# Altium PCB Board.PcbDoc
Units mm, origin at the board's own origin, x right, y up, seen from the top; angles counter-clockwise.
Board outline 173.2 x 200 mm, 2 copper layers (Top Layer, Bottom Layer); 151 components, 106 nets, 491 pads, 0 vias.
Unrouted connection lines stored in the file: 366.
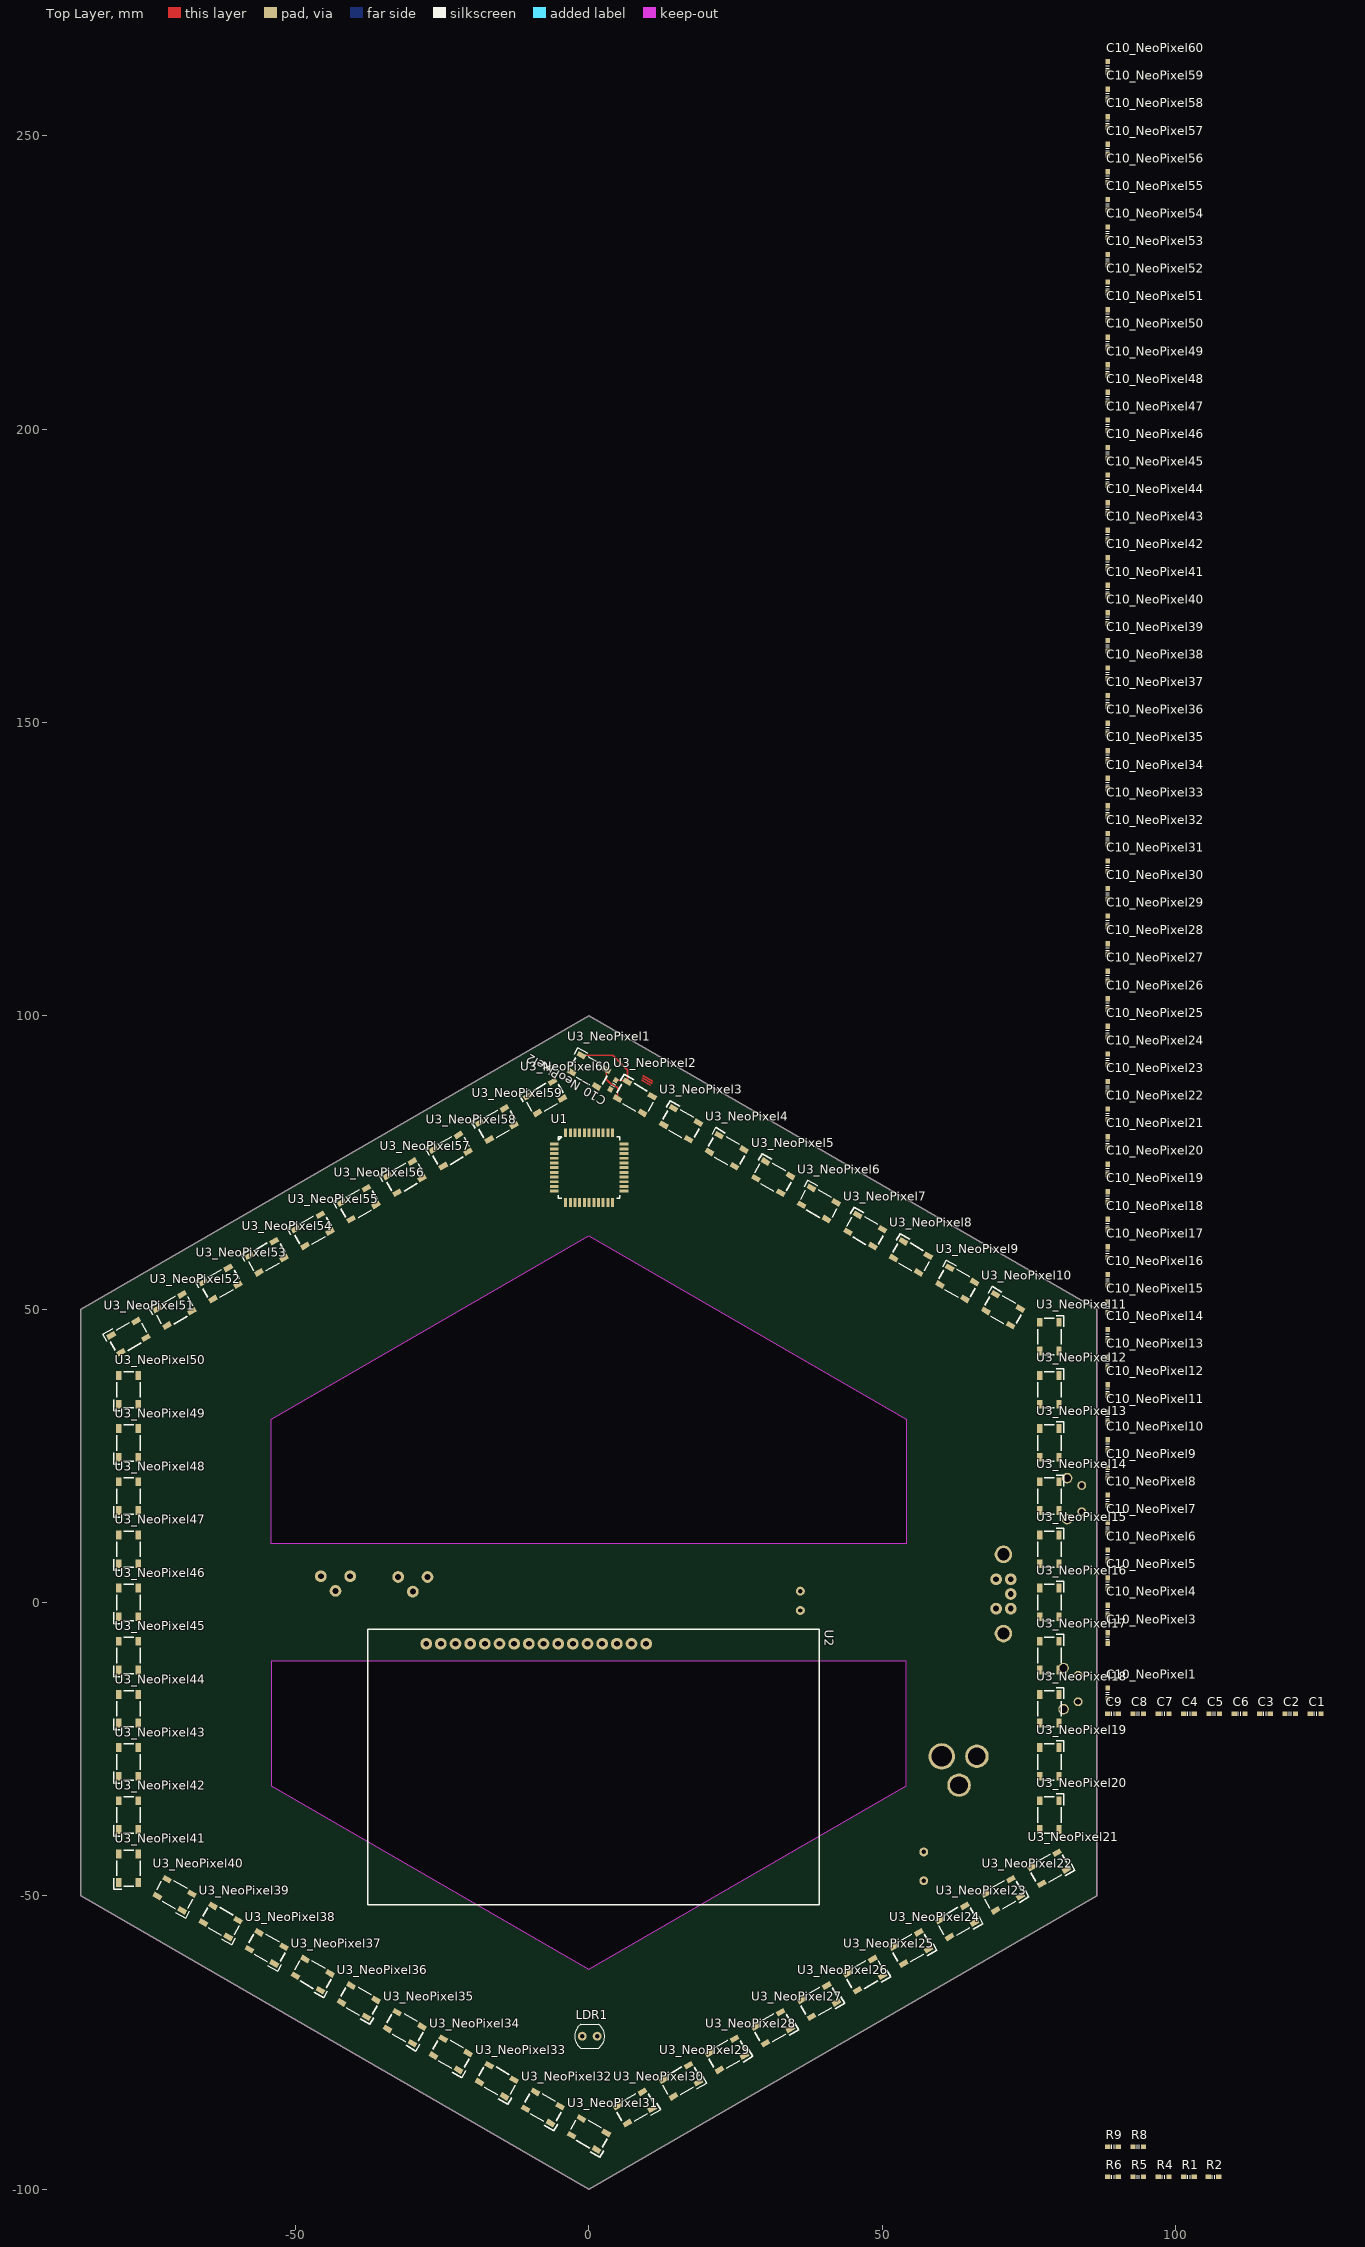
[diagram p0: Top Layer view]
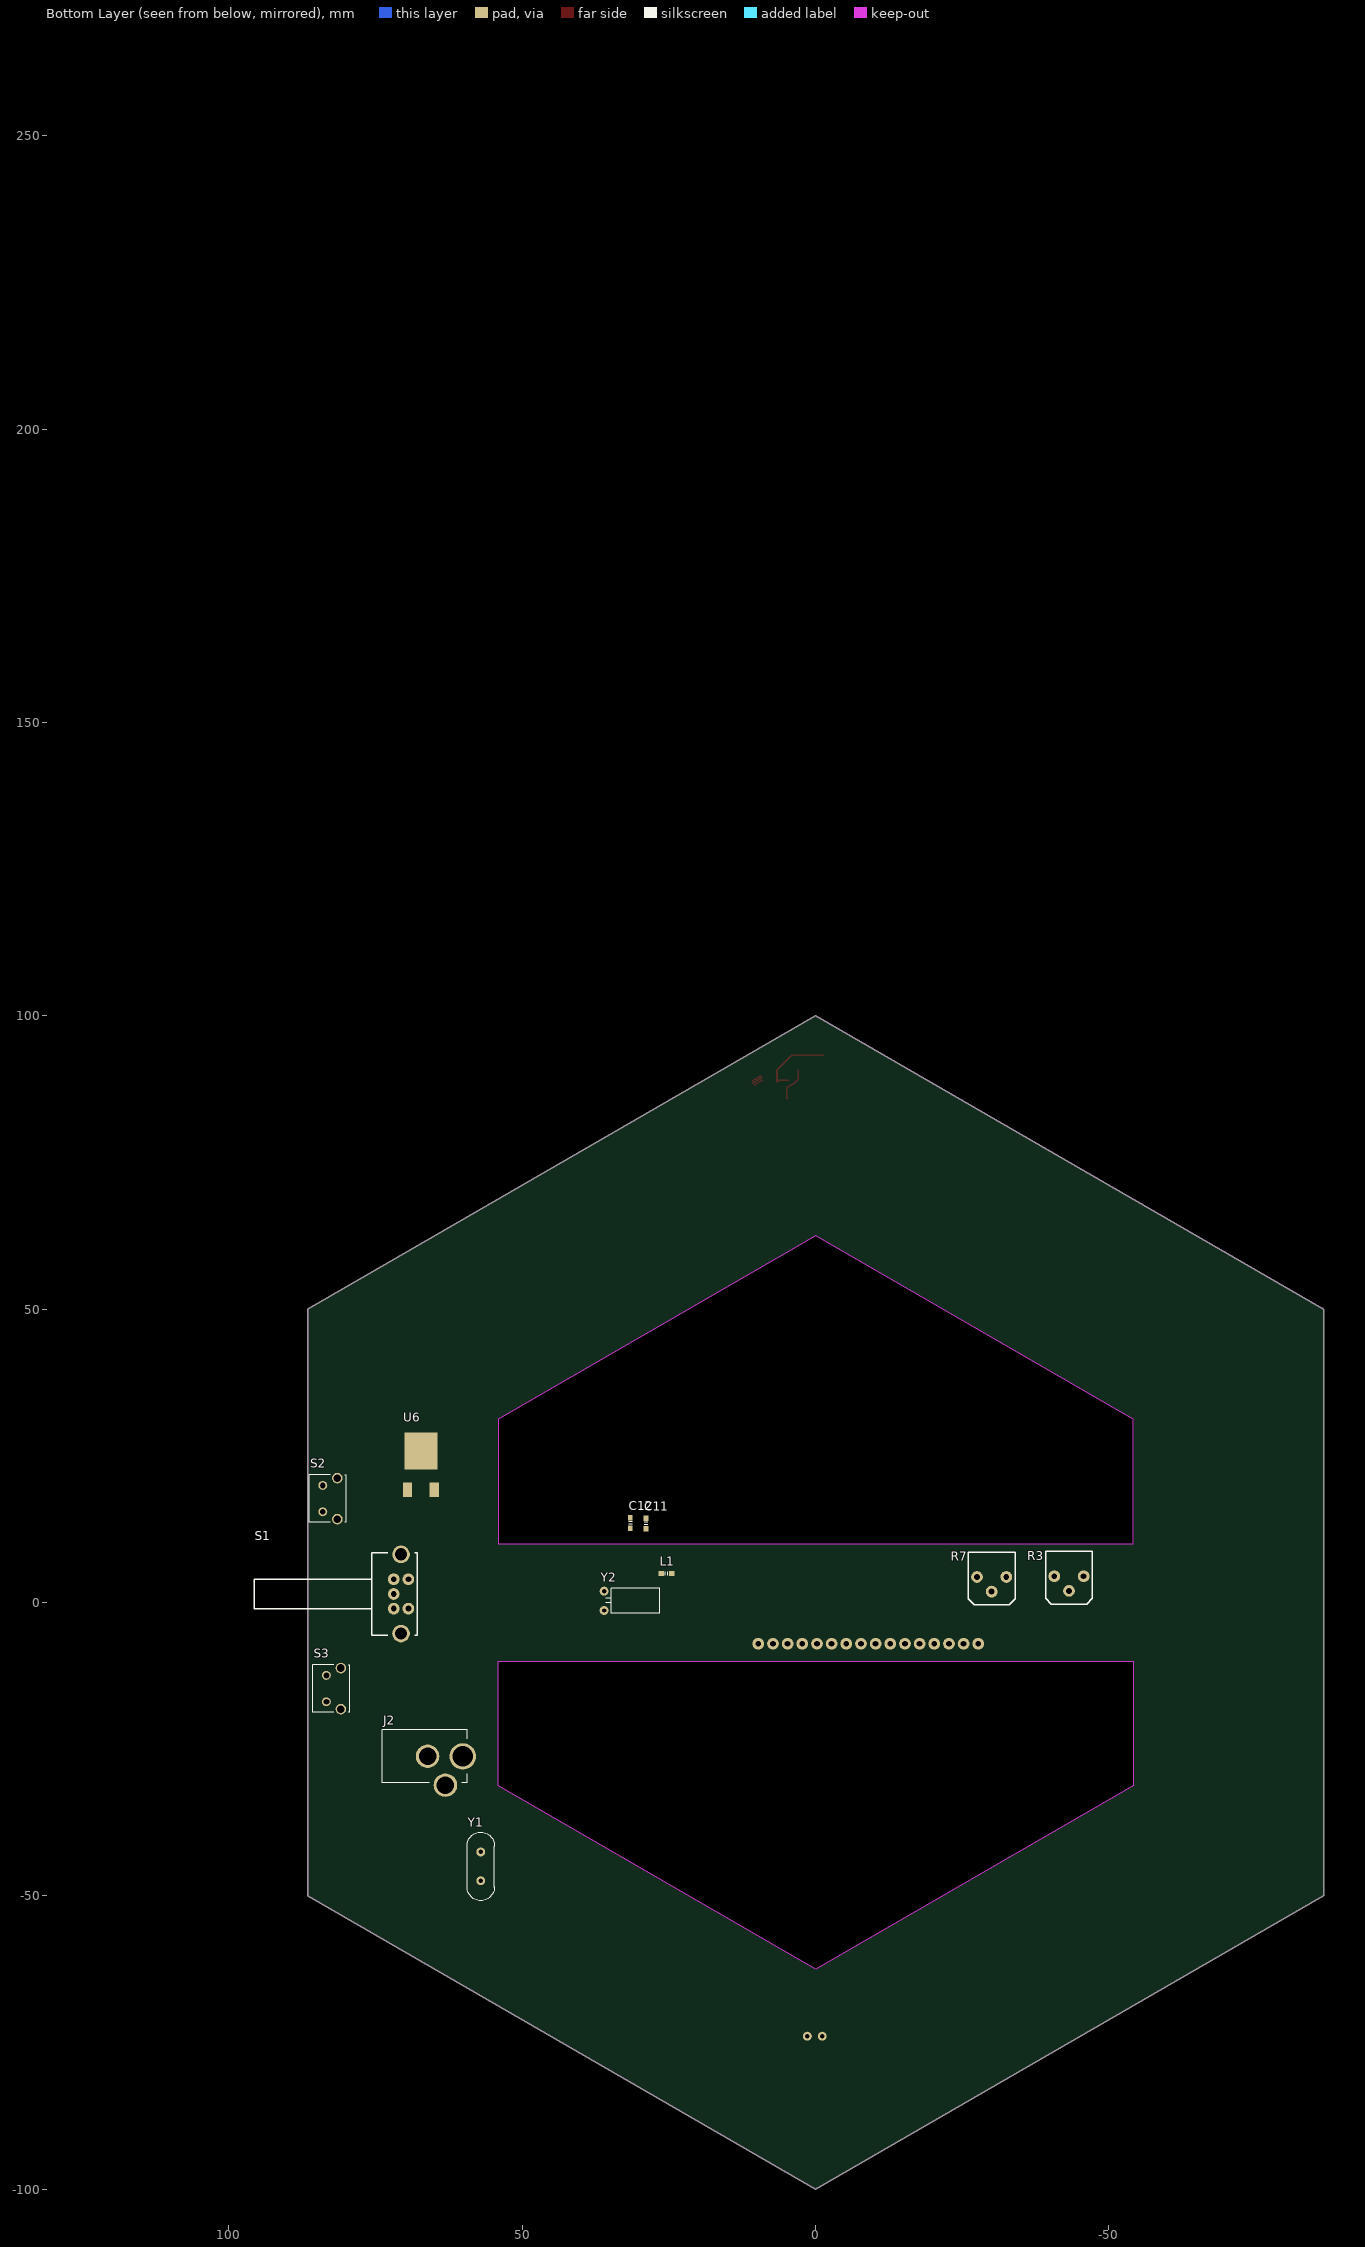
[diagram p1: Bottom Layer view, seen from below]

## Layer stack, top to bottom
Top Solder: solder mask 0.0102, Solder Resist, Dk 3.5
Top Layer: signal copper 0.0356
Dielectric 1: dielectric 0.32, FR-4, Dk 4.8
Bottom Layer: signal copper 0.0356
Bottom Solder: solder mask 0.0102, Solder Resist, Dk 3.5

## Board outline
-86.6,-50 0,-100 86.6,-50 86.6,50 0,100 -86.6,50
cut-out: -54.125,-10 -54.125,-31.25 0,-62.5 54.125,-31.25 54.125,-10
cut-out: -54.125,10 -54.125,31.25 0,62.5 54.125,31.25 54.125,10

## Design rules (kind name [scope] priority, off if disabled: settings)
Clearance [All] p1: gap=0.1
PolygonConnect [All] p1: connectstyle=Relief reliefconductorwidth=0.254 reliefentries=4 polygonreliefangle="90 Angle" airgapwidth=0.254
RoutingVias [All] p1: holewidth=0.711 width=1.27 viastyle="Through Hole" minholewidth=0.711 minwidth=1.27 maxholewidth=0.711 maxwidth=1.27
SolderMaskExpansion [All] p1: expansion=0.102
UnpouredPolygon [All] p1: allowunpoured=FALSE
Width [All] p1: maxlimit=0.3 minlimit=0.254 preferedwidth=0.254
29 further rules are at their usual default settings.

## Classes and differential pairs
net class DB[0..7]: DB0 DB1 DB2 DB3 DB4 DB5 DB6 DB7
component class TEMPERATURE: R8 R9 U7
component class RainbowClock: C1 C2 C3 C4 C5 C6 C7 C8 C9 LDR1 R1 R2 R3 R4 R5 R6 S1 S2 S3 U1 Y1 Y2
component class LCD: R7 U2
component class BLUETOOTH: U4
component class NeoPixel1: C10_NeoPixel1 U3_NeoPixel1
component class NeoPixel2: C10_NeoPixel2 U3_NeoPixel2
component class NeoPixel3: C10_NeoPixel3 U3_NeoPixel3
component class NeoPixel4: C10_NeoPixel4 U3_NeoPixel4
component class NeoPixel5: C10_NeoPixel5 U3_NeoPixel5
component class NeoPixel6: C10_NeoPixel6 U3_NeoPixel6
component class NeoPixel7: C10_NeoPixel7 U3_NeoPixel7
component class NeoPixel8: C10_NeoPixel8 U3_NeoPixel8
component class NeoPixel9: C10_NeoPixel9 U3_NeoPixel9
component class NeoPixel10: C10_NeoPixel10 U3_NeoPixel10
component class NeoPixel11: C10_NeoPixel11 U3_NeoPixel11
component class NeoPixel12: C10_NeoPixel12 U3_NeoPixel12
component class NeoPixel13: C10_NeoPixel13 U3_NeoPixel13
component class NeoPixel14: C10_NeoPixel14 U3_NeoPixel14
component class NeoPixel15: C10_NeoPixel15 U3_NeoPixel15
component class NeoPixel16: C10_NeoPixel16 U3_NeoPixel16
component class NeoPixel17: C10_NeoPixel17 U3_NeoPixel17
component class NeoPixel18: C10_NeoPixel18 U3_NeoPixel18
component class NeoPixel19: C10_NeoPixel19 U3_NeoPixel19
component class NeoPixel20: C10_NeoPixel20 U3_NeoPixel20
component class NeoPixel21: C10_NeoPixel21 U3_NeoPixel21
component class NeoPixel22: C10_NeoPixel22 U3_NeoPixel22
component class NeoPixel23: C10_NeoPixel23 U3_NeoPixel23
component class NeoPixel24: C10_NeoPixel24 U3_NeoPixel24
component class NeoPixel25: C10_NeoPixel25 U3_NeoPixel25
component class NeoPixel26: C10_NeoPixel26 U3_NeoPixel26
component class NeoPixel27: C10_NeoPixel27 U3_NeoPixel27
component class NeoPixel28: C10_NeoPixel28 U3_NeoPixel28
component class NeoPixel29: C10_NeoPixel29 U3_NeoPixel29
component class NeoPixel30: C10_NeoPixel30 U3_NeoPixel30
component class NeoPixel31: C10_NeoPixel31 U3_NeoPixel31
component class NeoPixel32: C10_NeoPixel32 U3_NeoPixel32
component class NeoPixel33: C10_NeoPixel33 U3_NeoPixel33
component class NeoPixel34: C10_NeoPixel34 U3_NeoPixel34
component class NeoPixel35: C10_NeoPixel35 U3_NeoPixel35
component class NeoPixel36: C10_NeoPixel36 U3_NeoPixel36
component class NeoPixel37: C10_NeoPixel37 U3_NeoPixel37
component class NeoPixel38: C10_NeoPixel38 U3_NeoPixel38
component class NeoPixel39: C10_NeoPixel39 U3_NeoPixel39
component class NeoPixel40: C10_NeoPixel40 U3_NeoPixel40
component class NeoPixel41: C10_NeoPixel41 U3_NeoPixel41
component class NeoPixel42: C10_NeoPixel42 U3_NeoPixel42
component class NeoPixel43: C10_NeoPixel43 U3_NeoPixel43
component class NeoPixel44: C10_NeoPixel44 U3_NeoPixel44
component class NeoPixel45: C10_NeoPixel45 U3_NeoPixel45
component class NeoPixel46: C10_NeoPixel46 U3_NeoPixel46
component class NeoPixel47: C10_NeoPixel47 U3_NeoPixel47
component class NeoPixel48: C10_NeoPixel48 U3_NeoPixel48
component class NeoPixel49: C10_NeoPixel49 U3_NeoPixel49
component class NeoPixel50: C10_NeoPixel50 U3_NeoPixel50
component class NeoPixel51: C10_NeoPixel51 U3_NeoPixel51
component class NeoPixel52: C10_NeoPixel52 U3_NeoPixel52
component class NeoPixel53: C10_NeoPixel53 U3_NeoPixel53
component class NeoPixel54: C10_NeoPixel54 U3_NeoPixel54
component class NeoPixel55: C10_NeoPixel55 U3_NeoPixel55
component class NeoPixel56: C10_NeoPixel56 U3_NeoPixel56
component class NeoPixel57: C10_NeoPixel57 U3_NeoPixel57
component class NeoPixel58: C10_NeoPixel58 U3_NeoPixel58
component class NeoPixel59: C10_NeoPixel59 U3_NeoPixel59
component class NeoPixel60: C10_NeoPixel60 U3_NeoPixel60
component class POWER: C11 C12 J2 L1 U6
channel class Neopixel: NeoPixel1 NeoPixel2 NeoPixel3 NeoPixel4 NeoPixel5 NeoPixel6 NeoPixel7 NeoPixel8 NeoPixel9 NeoPixel10 NeoPixel11 NeoPixel12 NeoPixel13 NeoPixel14 NeoPixel15 NeoPixel16 NeoPixel17 NeoPixel18 NeoPixel19 NeoPixel20 NeoPixel21 NeoPixel22 NeoPixel23 NeoPixel24 NeoPixel25 NeoPixel26 NeoPixel27 NeoPixel28 NeoPixel29 NeoPixel30 NeoPixel31 NeoPixel32 NeoPixel33 NeoPixel34 NeoPixel35 NeoPixel36 NeoPixel37 NeoPixel38 NeoPixel39 NeoPixel40 NeoPixel41 NeoPixel42 NeoPixel43 NeoPixel44 NeoPixel45 NeoPixel46 NeoPixel47 NeoPixel48 NeoPixel49 NeoPixel50 NeoPixel51 NeoPixel52 NeoPixel53 NeoPixel54 NeoPixel55 NeoPixel56 NeoPixel57 NeoPixel58 NeoPixel59 NeoPixel60

## Components (designator, comment, footprint, x,y, rotation, side; value= is the part's Value field where it differs from the comment)
C1 "27pF" CAP0603 123.876,-18.974 r0 top
C2 "27pF" CAP0603 119.558,-18.974 r0 top
C3 "15pF" CAP0603 115.24,-18.974 r0 top
C4 "100nF" CAP0603 102.286,-18.974 r0 top
C5 "100nF" CAP0603 106.604,-18.974 r0 top
C6 "100nF" CAP0603 110.922,-18.974 r0 top
C7 "15pF" CAP0603 97.968,-18.974 r0 top
C8 "1uF" CAP0603 93.65,-18.974 r0 top
C9 "10uF" CAP0603 89.332,-18.974 r0 top
C10_NeoPixel1 "100nF" CAP0603 88.417,-15.469 r90 top (schematic designator C10)
C10_NeoPixel2 "100nF" CAP0603 4.115,88.24 r240 top (schematic designator C10)
C10_NeoPixel3 "100nF" CAP0603 88.417,-6.071 r90 top (schematic designator C10)
C10_NeoPixel4 "100nF" CAP0603 88.417,-1.372 r90 top (schematic designator C10)
C10_NeoPixel5 "100nF" CAP0603 88.417,3.327 r90 top (schematic designator C10)
C10_NeoPixel6 "100nF" CAP0603 88.417,8.026 r90 top (schematic designator C10)
C10_NeoPixel7 "100nF" CAP0603 88.417,12.725 r90 top (schematic designator C10)
C10_NeoPixel8 "100nF" CAP0603 88.417,17.424 r90 top (schematic designator C10)
C10_NeoPixel9 "100nF" CAP0603 88.417,22.123 r90 top (schematic designator C10)
C10_NeoPixel10 "100nF" CAP0603 88.417,26.822 r90 top (schematic designator C10)
C10_NeoPixel11 "100nF" CAP0603 88.417,31.521 r90 top (schematic designator C10)
C10_NeoPixel12 "100nF" CAP0603 88.417,36.22 r90 top (schematic designator C10)
C10_NeoPixel13 "100nF" CAP0603 88.417,40.919 r90 top (schematic designator C10)
C10_NeoPixel14 "100nF" CAP0603 88.417,45.618 r90 top (schematic designator C10)
C10_NeoPixel15 "100nF" CAP0603 88.417,50.317 r90 top (schematic designator C10)
C10_NeoPixel16 "100nF" CAP0603 88.417,55.016 r90 top (schematic designator C10)
C10_NeoPixel17 "100nF" CAP0603 88.417,59.715 r90 top (schematic designator C10)
C10_NeoPixel18 "100nF" CAP0603 88.417,64.414 r90 top (schematic designator C10)
C10_NeoPixel19 "100nF" CAP0603 88.417,69.113 r90 top (schematic designator C10)
C10_NeoPixel20 "100nF" CAP0603 88.417,73.812 r90 top (schematic designator C10)
C10_NeoPixel21 "100nF" CAP0603 88.417,78.511 r90 top (schematic designator C10)
C10_NeoPixel22 "100nF" CAP0603 88.417,83.21 r90 top (schematic designator C10)
C10_NeoPixel23 "100nF" CAP0603 88.417,87.909 r90 top (schematic designator C10)
C10_NeoPixel24 "100nF" CAP0603 88.417,92.608 r90 top (schematic designator C10)
C10_NeoPixel25 "100nF" CAP0603 88.417,97.307 r90 top (schematic designator C10)
C10_NeoPixel26 "100nF" CAP0603 88.417,102.006 r90 top (schematic designator C10)
C10_NeoPixel27 "100nF" CAP0603 88.417,106.705 r90 top (schematic designator C10)
C10_NeoPixel28 "100nF" CAP0603 88.417,111.404 r90 top (schematic designator C10)
C10_NeoPixel29 "100nF" CAP0603 88.417,116.103 r90 top (schematic designator C10)
C10_NeoPixel30 "100nF" CAP0603 88.417,120.802 r90 top (schematic designator C10)
C10_NeoPixel31 "100nF" CAP0603 88.417,125.501 r90 top (schematic designator C10)
C10_NeoPixel32 "100nF" CAP0603 88.417,130.2 r90 top (schematic designator C10)
C10_NeoPixel33 "100nF" CAP0603 88.417,134.899 r90 top (schematic designator C10)
C10_NeoPixel34 "100nF" CAP0603 88.417,139.598 r90 top (schematic designator C10)
C10_NeoPixel35 "100nF" CAP0603 88.417,144.297 r90 top (schematic designator C10)
C10_NeoPixel36 "100nF" CAP0603 88.417,148.996 r90 top (schematic designator C10)
C10_NeoPixel37 "100nF" CAP0603 88.417,153.695 r90 top (schematic designator C10)
C10_NeoPixel38 "100nF" CAP0603 88.417,158.394 r90 top (schematic designator C10)
C10_NeoPixel39 "100nF" CAP0603 88.417,163.093 r90 top (schematic designator C10)
C10_NeoPixel40 "100nF" CAP0603 88.417,167.792 r90 top (schematic designator C10)
C10_NeoPixel41 "100nF" CAP0603 88.417,172.491 r90 top (schematic designator C10)
C10_NeoPixel42 "100nF" CAP0603 88.417,177.19 r90 top (schematic designator C10)
C10_NeoPixel43 "100nF" CAP0603 88.417,181.889 r90 top (schematic designator C10)
C10_NeoPixel44 "100nF" CAP0603 88.417,186.588 r90 top (schematic designator C10)
C10_NeoPixel45 "100nF" CAP0603 88.417,191.287 r90 top (schematic designator C10)
C10_NeoPixel46 "100nF" CAP0603 88.417,195.986 r90 top (schematic designator C10)
C10_NeoPixel47 "100nF" CAP0603 88.417,200.685 r90 top (schematic designator C10)
C10_NeoPixel48 "100nF" CAP0603 88.417,205.384 r90 top (schematic designator C10)
C10_NeoPixel49 "100nF" CAP0603 88.417,210.083 r90 top (schematic designator C10)
C10_NeoPixel50 "100nF" CAP0603 88.417,214.782 r90 top (schematic designator C10)
C10_NeoPixel51 "100nF" CAP0603 88.417,219.481 r90 top (schematic designator C10)
C10_NeoPixel52 "100nF" CAP0603 88.417,224.18 r90 top (schematic designator C10)
C10_NeoPixel53 "100nF" CAP0603 88.417,228.879 r90 top (schematic designator C10)
C10_NeoPixel54 "100nF" CAP0603 88.417,233.578 r90 top (schematic designator C10)
C10_NeoPixel55 "100nF" CAP0603 88.417,238.277 r90 top (schematic designator C10)
C10_NeoPixel56 "100nF" CAP0603 88.417,242.976 r90 top (schematic designator C10)
C10_NeoPixel57 "100nF" CAP0603 88.417,247.675 r90 top (schematic designator C10)
C10_NeoPixel58 "100nF" CAP0603 88.417,252.374 r90 top (schematic designator C10)
C10_NeoPixel59 "100nF" CAP0603 88.417,257.073 r90 top (schematic designator C10)
C10_NeoPixel60 "100nF" CAP0603 88.417,261.772 r90 top (schematic designator C10)
C11 "0.47uF" 0603 28.905,13.462 r90 bottom
C12 "22uF" 0603 31.572,13.538 r90 bottom
J2 "PWR2.5" MJ-179PH 73.838,-26.238 r180 bottom
L1 "1K" 0603 25.4,4.928 r180 bottom
LDR1 "LDR" VT935G 0.127,-73.939 r0 top
R1 "1K" RES0603 102.286,-97.917 r0 top
R2 "1K" RES0603 106.477,-97.917 r0 top
R3 "3306P-1-203" 3306P-1-202 -43.205,3.226 r0 bottom
R4 "4.7K" RES0603 97.968,-97.917 r0 top
R5 "4.7K" RES0603 93.65,-97.917 r0 top
R6 "4.7K" RES0603 89.332,-97.917 r0 top
R7 "3306P-1-203" 3306P-1-202 -30.023,3.099 r0 bottom
R8 "1K" RES0603 93.65,-92.786 r0 top
R9 "1K" RES0603 89.332,-92.786 r0 top
S1 "EC11B152420G-STEC11B01" EC11B152420G-STEC11B01 71.907,1.448 r0 bottom
S2 "SW-PB" 1-1825027-4 82.753,17.704 r270 bottom
S3 "SW-PB" 1-1825027-4 82.144,-14.681 r270 bottom
U1 "PIC32MX110F016D-I/PT" PIC32MX110F016H-I/PT 0.025,74.117 r0 top
U2 "MC42003A6W-BNMLW" MC42004A6W-BNMLW -37.744,-51.537 r0 top
U3_NeoPixel1 "WS2012B" WS2812B 0,90.625 r150 top (schematic designator U3)
U3_NeoPixel2 "WS2012B" WS2812B 7.85,86.1 r150 top (schematic designator U3)
U3_NeoPixel3 "WS2012B" WS2812B 15.7,81.6 r150 top (schematic designator U3)
U3_NeoPixel4 "WS2012B" WS2812B 23.5,77 r150 top (schematic designator U3)
U3_NeoPixel5 "WS2012B" WS2812B 31.4,72.5 r150 top (schematic designator U3)
U3_NeoPixel6 "WS2012B" WS2812B 39.2,68 r150 top (schematic designator U3)
U3_NeoPixel7 "WS2012B" WS2812B 47.1,63.4 r150 top (schematic designator U3)
U3_NeoPixel8 "WS2012B" WS2812B 54.9,58.9 r150 top (schematic designator U3)
U3_NeoPixel9 "WS2012B" WS2812B 62.8,54.4 r150 top (schematic designator U3)
U3_NeoPixel10 "WS2012B" WS2812B 70.6,49.9 r150 top (schematic designator U3)
U3_NeoPixel11 "WS2012B" WS2812B 78.481,45.313 r90 top (schematic designator U3)
U3_NeoPixel12 "WS2012B" WS2812B 78.481,36.25 r90 top (schematic designator U3)
U3_NeoPixel13 "WS2012B" WS2812B 78.481,27.188 r90 top (schematic designator U3)
U3_NeoPixel14 "WS2012B" WS2812B 78.481,18.125 r90 top (schematic designator U3)
U3_NeoPixel15 "WS2012B" WS2812B 78.481,9.063 r90 top (schematic designator U3)
U3_NeoPixel16 "WS2012B" WS2812B 78.481,0 r90 top (schematic designator U3)
U3_NeoPixel17 "WS2012B" WS2812B 78.481,-9.063 r90 top (schematic designator U3)
U3_NeoPixel18 "WS2012B" WS2812B 78.481,-18.125 r90 top (schematic designator U3)
U3_NeoPixel19 "WS2012B" WS2812B 78.481,-27.188 r90 top (schematic designator U3)
U3_NeoPixel20 "WS2012B" WS2812B 78.481,-36.25 r90 top (schematic designator U3)
U3_NeoPixel21 "WS2012B" WS2812B 78.481,-45.313 r30 top (schematic designator U3)
U3_NeoPixel22 "WS2012B" WS2812B 70.633,-49.844 r30 top (schematic designator U3)
U3_NeoPixel23 "WS2012B" WS2812B 62.785,-54.375 r30 top (schematic designator U3)
U3_NeoPixel24 "WS2012B" WS2812B 54.937,-58.907 r30 top (schematic designator U3)
U3_NeoPixel25 "WS2012B" WS2812B 47.089,-63.438 r30 top (schematic designator U3)
U3_NeoPixel26 "WS2012B" WS2812B 39.241,-67.969 r30 top (schematic designator U3)
U3_NeoPixel27 "WS2012B" WS2812B 31.392,-72.5 r30 top (schematic designator U3)
U3_NeoPixel28 "WS2012B" WS2812B 23.544,-77.031 r30 top (schematic designator U3)
U3_NeoPixel29 "WS2012B" WS2812B 15.696,-81.563 r30 top (schematic designator U3)
U3_NeoPixel30 "WS2012B" WS2812B 7.848,-86.094 r30 top (schematic designator U3)
U3_NeoPixel31 "WS2012B" WS2812B 0,-90.625 r330 top (schematic designator U3)
U3_NeoPixel32 "WS2012B" WS2812B -7.848,-86.094 r330 top (schematic designator U3)
U3_NeoPixel33 "WS2012B" WS2812B -15.696,-81.563 r330 top (schematic designator U3)
U3_NeoPixel34 "WS2012B" WS2812B -23.544,-77.031 r330 top (schematic designator U3)
U3_NeoPixel35 "WS2012B" WS2812B -31.392,-72.5 r330 top (schematic designator U3)
U3_NeoPixel36 "WS2012B" WS2812B -39.241,-67.969 r330 top (schematic designator U3)
U3_NeoPixel37 "WS2012B" WS2812B -47.089,-63.438 r330 top (schematic designator U3)
U3_NeoPixel38 "WS2012B" WS2812B -54.937,-58.907 r330 top (schematic designator U3)
U3_NeoPixel39 "WS2012B" WS2812B -62.785,-54.375 r330 top (schematic designator U3)
U3_NeoPixel40 "WS2012B" WS2812B -70.633,-49.844 r330 top (schematic designator U3)
U3_NeoPixel41 "WS2012B" WS2812B -78.481,-45.313 r270 top (schematic designator U3)
U3_NeoPixel42 "WS2012B" WS2812B -78.481,-36.25 r270 top (schematic designator U3)
U3_NeoPixel43 "WS2012B" WS2812B -78.481,-27.188 r270 top (schematic designator U3)
U3_NeoPixel44 "WS2012B" WS2812B -78.481,-18.125 r270 top (schematic designator U3)
U3_NeoPixel45 "WS2012B" WS2812B -78.481,-9.063 r270 top (schematic designator U3)
U3_NeoPixel46 "WS2012B" WS2812B -78.481,0 r270 top (schematic designator U3)
U3_NeoPixel47 "WS2012B" WS2812B -78.481,9.063 r270 top (schematic designator U3)
U3_NeoPixel48 "WS2012B" WS2812B -78.481,18.125 r270 top (schematic designator U3)
U3_NeoPixel49 "WS2012B" WS2812B -78.481,27.188 r270 top (schematic designator U3)
U3_NeoPixel50 "WS2012B" WS2812B -78.481,36.25 r270 top (schematic designator U3)
U3_NeoPixel51 "WS2012B" WS2812B -78.481,45.313 r210 top (schematic designator U3)
U3_NeoPixel52 "WS2012B" WS2812B -70.633,49.844 r210 top (schematic designator U3)
U3_NeoPixel53 "WS2012B" WS2812B -62.785,54.375 r210 top (schematic designator U3)
U3_NeoPixel54 "WS2012B" WS2812B -54.937,58.907 r210 top (schematic designator U3)
U3_NeoPixel55 "WS2012B" WS2812B -47.089,63.438 r210 top (schematic designator U3)
U3_NeoPixel56 "WS2012B" WS2812B -39.241,67.969 r210 top (schematic designator U3)
U3_NeoPixel57 "WS2012B" WS2812B -31.393,72.501 r210 top (schematic designator U3)
U3_NeoPixel58 "WS2012B" WS2812B -23.544,77.031 r210 top (schematic designator U3)
U3_NeoPixel59 "WS2012B" WS2812B -15.696,81.563 r210 top (schematic designator U3)
U3_NeoPixel60 "WS2012B" WS2812B -7.488,86.094 r210 top (schematic designator U3)
U6 "TS2940CP-3.3 C5" "TS2940CP-3.3 C5" 67.259,25.781 r180 bottom
Y1 "8MHz XTAL" FOXSLF/080-20 57.074,-44.983 r90 bottom
Y2 "32kHz XTAL" NCL38LF 36.043,0.279 r270 bottom

## Footprints (in the part's own frame and the unit in brackets; to place one, negate y for a bottom-side part, rotate by r counter-clockwise, add the part's x,y. Pads: shape width x height; smd on the part's side, far side on the other; paste and mask are expansions set on the pad)
1-1825027-4 [mm] "Button"
  round 1.8 hole 1.3 unplated: 0(-3.5,1.24) 1(3.5,1.24)
  round 1.524 hole 1: 2(-2.25,-1.245) 3(2.25,-1.245)
  silkscreen extent -4.06,-3.56 4.06,2.75, body extent -3.2,-3.3 3.2,1.8, height 7
0603 [mm]
  rect 0.9x0.8 smd: 1(-0.9,0) 2(0.9,0)
  silkscreen extent -0.2,-0.3 0.2,0.3, body extent -1,-0.53 1,0.52, height 1
3306P-1-202 [mm] "Trimpot"
  round 2 hole 1: 1(-2.5,-1.25) 2(0,1.25) 3(2.5,-1.25)
  silkscreen extent -4,-5.5 4,3.5, body extent -3.4,-5.1 3.4,2.95, height 8.06
CAP0603 [mm]
  rect 0.9x0.8 smd: 1(-0.9,0) 2(0.9,0)
  silkscreen extent -0.2,-0.3 0.2,0.3, body extent -1,-0.53 1,0.52, height 1
EC11B152420G-STEC11B01 [mm]
  round 3 hole 2.1: 0(-1.25,-6.75) 0(-1.25,6.75)
  round 2 hole 1: 1(0,-2.5) 2(0,2.5) 3(0,0) D(-2.5,-2.5) E(-2.5,2.5)
  silkscreen extent -4,-7.05 23.8,7.05, body extent -4,-7 24.02,7, height 13.75
FOXSLF/080-20 [mil] "8MHz XTAL"
  round 60 hole 30: 1(-96.46,0) 2(96.46,0)
  silkscreen extent -230,-92 230,92, body extent -224,-86 224,86, height 142
MC42004A6W-BNMLW [mm] "LCD"
  round 2 hole 1: 1(10,44.5) 2(12.5,44.5) 3(15,44.5) 4(17.5,44.5) 5(20,44.5) 6(22.5,44.5) 7(25,44.5) 8(27.5,44.5) 9(30,44.5) 10(32.5,44.5) 11(35,44.5) 12(37.5,44.5) 13(40,44.5) 14(42.5,44.5) 15(45,44.5) 16(47.5,44.5)
  silkscreen extent 0,0 77,47, body extent -0.2,0.2 77.2,46.8, height 14.35
MJ-179PH [mm] "Powerjack"
  round 4.5 hole 3.5: 1(13.7,0)
  round 4 hole 3: 2(10.75,-4.9) 3(7.7,0)
  silkscreen extent 0,-4.5 14.5,4.5, body extent 0,-4.4 14.4,4.4, height 11
NCL38LF [mil] "32kHz XTAL"
  round 60 hole 30: 1(-64.96,0) 2(64.96,0)
  silkscreen extent -85,10 85,374, body extent -62,48 63,375, height 118
PIC32MX110F016H-I/PT [mm] "MCU"
  rect 1.5x0.5 smd: 1(-5.95,4) 2(-5.95,3.2) 3(-5.95,2.4) 4(-5.95,1.6) 5(-5.95,0.8) 6(-5.95,0) 7(-5.95,-0.8) 8(-5.95,-1.6) 9(-5.95,-2.4) 10(-5.95,-3.2) 11(-5.95,-4) 23(5.95,-4) 24(5.95,-3.2) 25(5.95,-2.4) 26(5.95,-1.6) 27(5.95,-0.8) 28(5.95,0) 29(5.95,0.8) 30(5.95,1.6) 31(5.95,2.4) 32(5.95,3.2) 33(5.95,4)
  rect 0.5x1.5 smd: 12(-4,-5.95) 13(-3.2,-5.95) 14(-2.4,-5.95) 15(-1.6,-5.95) 16(-0.8,-5.95) 17(0,-5.95) 18(0.8,-5.95) 19(1.6,-5.95) 20(2.4,-5.95) 21(3.2,-5.95) 22(4,-5.95) 34(4,5.95) 35(3.2,5.95) 36(2.4,5.95) 37(1.6,5.95) 38(0.8,5.95) 39(0,5.95) 40(-0.8,5.95) 41(-1.6,5.95) 42(-2.4,5.95) 43(-3.2,5.95) 44(-4,5.95)
  silkscreen extent -5.25,-5.25 5.25,5.25, body extent -5.05,-5.05 5.05,5.05, height 1.1
RES0603 [mm]
  rect 0.9x0.8 smd: 1(-0.9,0) 2(0.9,0)
  silkscreen extent -0.2,-0.3 0.2,0.3, body extent -1,-0.53 1,0.52, height 1
"TS2940CP-3.3 C5" [mm] "Voltage Regulator"
  rect 1.6x2.5 smd: 1(-2.3,-6.59) 3(2.27,-6.59)
  rect 5.7x6.3 smd: 2(0,0)
  body extent -3.27,-4.08 3.33,4.26, height 2.3
VT935G [mil] "Photoconductive cell"
  round 60 hole 30: 1(-50,0) 2(50,0)
  silkscreen extent -100,-80 100,80, body extent -104,-76 104,74, height 70
WS2812B [mm] "RGB Led"
  rect 1.5x0.9 smd: 1(-2.45,1.65) 2(-2.45,-1.65) 3(2.45,-1.65) 4(2.45,1.65)
  silkscreen extent -3.1,-2.5 3.6,2, body extent -2.5,-2.5 2.5,2.5, height 1.1

## Part data
C1 C2 C3 C4 C5 C6 C7 C8 C9 C10_NeoPixel1 C10_NeoPixel2 C10_NeoPixel3 C10_NeoPixel4 C10_NeoPixel5 C10_NeoPixel6 C10_NeoPixel7 C10_NeoPixel8 C10_NeoPixel9 C10_NeoPixel10 C10_NeoPixel11 C10_NeoPixel12 C10_NeoPixel13 C10_NeoPixel14 C10_NeoPixel15 C10_NeoPixel16 C10_NeoPixel17 C10_NeoPixel18 C10_NeoPixel19 C10_NeoPixel20 C10_NeoPixel21 C10_NeoPixel22 C10_NeoPixel23 C10_NeoPixel24 C10_NeoPixel25 C10_NeoPixel26 C10_NeoPixel27 C10_NeoPixel28 C10_NeoPixel29 C10_NeoPixel30 C10_NeoPixel31 C10_NeoPixel32 C10_NeoPixel33 C10_NeoPixel34 C10_NeoPixel35 C10_NeoPixel36 C10_NeoPixel37 C10_NeoPixel38 C10_NeoPixel39 C10_NeoPixel40 C10_NeoPixel41 C10_NeoPixel42 C10_NeoPixel43 C10_NeoPixel44 C10_NeoPixel45 C10_NeoPixel46 C10_NeoPixel47 C10_NeoPixel48 C10_NeoPixel49 C10_NeoPixel50 C10_NeoPixel51 C10_NeoPixel52 C10_NeoPixel53 C10_NeoPixel54 C10_NeoPixel55 C10_NeoPixel56 C10_NeoPixel57 C10_NeoPixel58 C10_NeoPixel59 C10_NeoPixel60 C11 C12: library part Cap, "Capacitor"
J2: "Low Voltage Power Supply Connector"
L1: library part Inductor, "Inductor"
LDR1: "Photoresistor"
R1 R2 R4 R5 R6 R8 R9: library part Res1, "Resistor"
R3 R7: library part 3306P-1-202, "Trimpot"
S1: "Rotary encoder"
S2 S3: "Switch"
U1: "Microcontroller"
U2: "LCD"
U3_NeoPixel1 U3_NeoPixel2 U3_NeoPixel3 U3_NeoPixel4 U3_NeoPixel5 U3_NeoPixel6 U3_NeoPixel7 U3_NeoPixel8 U3_NeoPixel9 U3_NeoPixel10 U3_NeoPixel11 U3_NeoPixel12 U3_NeoPixel13 U3_NeoPixel14 U3_NeoPixel15 U3_NeoPixel16 U3_NeoPixel17 U3_NeoPixel18 U3_NeoPixel19 U3_NeoPixel20 U3_NeoPixel21 U3_NeoPixel22 U3_NeoPixel23 U3_NeoPixel24 U3_NeoPixel25 U3_NeoPixel26 U3_NeoPixel27 U3_NeoPixel28 U3_NeoPixel29 U3_NeoPixel30 U3_NeoPixel31 U3_NeoPixel32 U3_NeoPixel33 U3_NeoPixel34 U3_NeoPixel35 U3_NeoPixel36 U3_NeoPixel37 U3_NeoPixel38 U3_NeoPixel39 U3_NeoPixel40 U3_NeoPixel41 U3_NeoPixel42 U3_NeoPixel43 U3_NeoPixel44 U3_NeoPixel45 U3_NeoPixel46 U3_NeoPixel47 U3_NeoPixel48 U3_NeoPixel49 U3_NeoPixel50 U3_NeoPixel51 U3_NeoPixel52 U3_NeoPixel53 U3_NeoPixel54 U3_NeoPixel55 U3_NeoPixel56 U3_NeoPixel57 U3_NeoPixel58 U3_NeoPixel59 U3_NeoPixel60: "Neopixel"
U6: library part "Volt Reg", "Voltage Regulator"
Y1 Y2: library part XTAL, "Crystal Oscillator"

## Nets (pads, with @x,y where several pads share a name; then routed paths per layer and width w, separated by ;. In a path a pad name is that pad's centre, name@x,y a point inside that pad or via, vN(x,y) a via of type N, cw(c..) or ccw(c..) an arc to the next point about the centre after c; other vN are vias at no path point)
5V: C10_NeoPixel1.2 C10_NeoPixel2.2 C10_NeoPixel3.2 C10_NeoPixel4.2 C10_NeoPixel5.2 C10_NeoPixel6.2 C10_NeoPixel7.2 C10_NeoPixel8.2 C10_NeoPixel9.2 C10_NeoPixel10.2 C10_NeoPixel11.2 C10_NeoPixel12.2 C10_NeoPixel13.2 C10_NeoPixel14.2 C10_NeoPixel15.2 C10_NeoPixel16.2 C10_NeoPixel17.2 C10_NeoPixel18.2 C10_NeoPixel19.2 C10_NeoPixel20.2 C10_NeoPixel21.2 C10_NeoPixel22.2 C10_NeoPixel23.2 C10_NeoPixel24.2 C10_NeoPixel25.2 C10_NeoPixel26.2 C10_NeoPixel27.2 C10_NeoPixel28.2 C10_NeoPixel29.2 C10_NeoPixel30.2 C10_NeoPixel31.2 C10_NeoPixel32.2 C10_NeoPixel33.2 C10_NeoPixel34.2 C10_NeoPixel35.2 C10_NeoPixel36.2 C10_NeoPixel37.2 C10_NeoPixel38.2 C10_NeoPixel39.2 C10_NeoPixel40.2 C10_NeoPixel41.2 C10_NeoPixel42.2 C10_NeoPixel43.2 C10_NeoPixel44.2 C10_NeoPixel45.2 C10_NeoPixel46.2 C10_NeoPixel47.2 C10_NeoPixel48.2 C10_NeoPixel49.2 C10_NeoPixel50.2 C10_NeoPixel51.2 C10_NeoPixel52.2 C10_NeoPixel53.2 C10_NeoPixel54.2 C10_NeoPixel55.2 C10_NeoPixel56.2 C10_NeoPixel57.2 C10_NeoPixel58.2 C10_NeoPixel59.2 C10_NeoPixel60.2 C11.2 J2.1 U3_NeoPixel1.1 U3_NeoPixel2.1 U3_NeoPixel3.1 U3_NeoPixel4.1 U3_NeoPixel5.1 U3_NeoPixel6.1 U3_NeoPixel7.1 U3_NeoPixel8.1 U3_NeoPixel9.1 U3_NeoPixel10.1 U3_NeoPixel11.1 U3_NeoPixel12.1 U3_NeoPixel13.1 U3_NeoPixel14.1 U3_NeoPixel15.1 U3_NeoPixel16.1 U3_NeoPixel17.1 U3_NeoPixel18.1 U3_NeoPixel19.1 U3_NeoPixel20.1 U3_NeoPixel21.1 U3_NeoPixel22.1 U3_NeoPixel23.1 U3_NeoPixel24.1 U3_NeoPixel25.1 U3_NeoPixel26.1 U3_NeoPixel27.1 U3_NeoPixel28.1 U3_NeoPixel29.1 U3_NeoPixel30.1 U3_NeoPixel31.1 U3_NeoPixel32.1 U3_NeoPixel33.1 U3_NeoPixel34.1 U3_NeoPixel35.1 U3_NeoPixel36.1 U3_NeoPixel37.1 U3_NeoPixel38.1 U3_NeoPixel39.1 U3_NeoPixel40.1 U3_NeoPixel41.1 U3_NeoPixel42.1 U3_NeoPixel43.1 U3_NeoPixel44.1 U3_NeoPixel45.1 U3_NeoPixel46.1 U3_NeoPixel47.1 U3_NeoPixel48.1 U3_NeoPixel49.1 U3_NeoPixel50.1 U3_NeoPixel51.1 U3_NeoPixel52.1 U3_NeoPixel53.1 U3_NeoPixel54.1 U3_NeoPixel55.1 U3_NeoPixel56.1 U3_NeoPixel57.1 U3_NeoPixel58.1 U3_NeoPixel59.1 U3_NeoPixel60.1 U6.1
CSB: R8.2
D0: U2.7
D1: U2.8
D2: U2.9
D3: U2.10
D4: U2.11
D5: U2.12
D6: U2.13
D7: U2.14
DB0: U1.8
DB1: U1.9
DB2: U1.10
DB3: U1.11
DB4: U1.14
DB5: U1.15
DB6: U1.25
DB7: U1.26
DOUT: U1.38 U3_NeoPixel60.2
E: U1.24 U2.6
GND: C1.2 C2.2 C3.2 C4.1 C5.1 C6.1 C7.2 C11.1 C12.1 J2.2 J2.3 R1.2 R2.1 R3.1 R5.1 R6.1 R7.3 R9.1 U2.1 U2.5 U2.16 U6.2
INT0: R1.1 S1.1 U1.43
INT1: R5.2 S2.2 U1.27
INT2: R6.2 S3.2 U1.36
INT3: R2.2 S1.3 U1.4
LED+: U1.3 U2.15
MCLR: R4.1 U1.18
NetC8_2: C8.2 C9.2 U1.7
NetLDR1_2: LDR1.2 R3.2 U1.20
OSCI: C1.1 U1.30 Y1.2
OSCO: C2.1 U1.31 Y1.1
PGEC: U1.22
PGED: U1.21
PX1: U1.41 U3_NeoPixel1.4
PX2: U3_NeoPixel1.2 U3_NeoPixel2.4 | length 6
  Top Layer w0.3: U3_NeoPixel1.2 2.947,89.204 3.619,88.533 4.829,87.834 4.903,87.76 U3_NeoPixel2.4 U3_NeoPixel2.4@4.829,85.97
PX3: U3_NeoPixel2.2 U3_NeoPixel3.4
PX4: U3_NeoPixel3.2 U3_NeoPixel4.4
PX5: U3_NeoPixel4.2 U3_NeoPixel5.4
PX6: U3_NeoPixel5.2 U3_NeoPixel6.4
PX7: U3_NeoPixel6.2 U3_NeoPixel7.4
PX8: U3_NeoPixel7.2 U3_NeoPixel8.4
PX9: U3_NeoPixel8.2 U3_NeoPixel9.4
PX10: U3_NeoPixel9.2 U3_NeoPixel10.4
PX11: U3_NeoPixel10.2 U3_NeoPixel11.4
PX12: U3_NeoPixel11.2 U3_NeoPixel12.4
PX13: U3_NeoPixel12.2 U3_NeoPixel13.4
PX14: U3_NeoPixel13.2 U3_NeoPixel14.4
PX15: U3_NeoPixel14.2 U3_NeoPixel15.4
PX16: U3_NeoPixel15.2 U3_NeoPixel16.4
PX17: U3_NeoPixel16.2 U3_NeoPixel17.4
PX18: U3_NeoPixel17.2 U3_NeoPixel18.4
PX19: U3_NeoPixel18.2 U3_NeoPixel19.4
PX20: U3_NeoPixel19.2 U3_NeoPixel20.4
PX21: U3_NeoPixel20.2 U3_NeoPixel21.4
PX22: U3_NeoPixel21.2 U3_NeoPixel22.4
PX23: U3_NeoPixel22.2 U3_NeoPixel23.4
PX24: U3_NeoPixel23.2 U3_NeoPixel24.4
PX25: U3_NeoPixel24.2 U3_NeoPixel25.4
PX26: U3_NeoPixel25.2 U3_NeoPixel26.4
PX27: U3_NeoPixel26.2 U3_NeoPixel27.4
PX28: U3_NeoPixel27.2 U3_NeoPixel28.4
PX29: U3_NeoPixel28.2 U3_NeoPixel29.4
PX30: U3_NeoPixel29.2 U3_NeoPixel30.4
PX31: U3_NeoPixel30.2 U3_NeoPixel31.4
PX32: U3_NeoPixel31.2 U3_NeoPixel32.4
PX33: U3_NeoPixel32.2 U3_NeoPixel33.4
PX34: U3_NeoPixel33.2 U3_NeoPixel34.4
PX35: U3_NeoPixel34.2 U3_NeoPixel35.4
PX36: U3_NeoPixel35.2 U3_NeoPixel36.4
PX37: U3_NeoPixel36.2 U3_NeoPixel37.4
PX38: U3_NeoPixel37.2 U3_NeoPixel38.4
PX39: U3_NeoPixel38.2 U3_NeoPixel39.4
PX40: U3_NeoPixel39.2 U3_NeoPixel40.4
PX41: U3_NeoPixel40.2 U3_NeoPixel41.4
PX42: U3_NeoPixel41.2 U3_NeoPixel42.4
PX43: U3_NeoPixel42.2 U3_NeoPixel43.4
PX44: U3_NeoPixel43.2 U3_NeoPixel44.4
PX45: U3_NeoPixel44.2 U3_NeoPixel45.4
PX46: U3_NeoPixel45.2 U3_NeoPixel46.4
PX47: U3_NeoPixel46.2 U3_NeoPixel47.4
PX48: U3_NeoPixel47.2 U3_NeoPixel48.4
PX49: U3_NeoPixel48.2 U3_NeoPixel49.4
PX50: U3_NeoPixel49.2 U3_NeoPixel50.4
PX51: U3_NeoPixel50.2 U3_NeoPixel51.4
PX52: U3_NeoPixel51.2 U3_NeoPixel52.4
PX53: U3_NeoPixel52.2 U3_NeoPixel53.4
PX54: U3_NeoPixel53.2 U3_NeoPixel54.4
PX55: U3_NeoPixel54.2 U3_NeoPixel55.4
PX56: U3_NeoPixel55.2 U3_NeoPixel56.4
PX57: U3_NeoPixel56.2 U3_NeoPixel57.4
PX58: U3_NeoPixel57.2 U3_NeoPixel58.4
PX59: U3_NeoPixel58.2 U3_NeoPixel59.4
PX60: U3_NeoPixel59.2 U3_NeoPixel60.4
RS: U1.23 U2.4
RX: U1.19
SCL: U1.44
SDA: U1.1
SDO: R9.2
SOSCI: C3.1 U1.33 Y2.2
SOSCO: C7.1 U1.34 Y2.1
TX: U1.42
V0: R7.2 U2.3
V3P3: C4.2 C5.2 C12.2 L1.1 LDR1.1 R4.2 R8.1 S1.2 S2.1 S3.1 U1.28 U1.40 U6.3
V3P3A: C6.2 L1.2 U1.17
V5: R7.1 U2.2
VSS: C8.1 C9.1 C10_NeoPixel1.1 C10_NeoPixel2.1 C10_NeoPixel3.1 C10_NeoPixel4.1 C10_NeoPixel5.1 C10_NeoPixel6.1 C10_NeoPixel7.1 C10_NeoPixel8.1 C10_NeoPixel9.1 C10_NeoPixel10.1 C10_NeoPixel11.1 C10_NeoPixel12.1 C10_NeoPixel13.1 C10_NeoPixel14.1 C10_NeoPixel15.1 C10_NeoPixel16.1 C10_NeoPixel17.1 C10_NeoPixel18.1 C10_NeoPixel19.1 C10_NeoPixel20.1 C10_NeoPixel21.1 C10_NeoPixel22.1 C10_NeoPixel23.1 C10_NeoPixel24.1 C10_NeoPixel25.1 C10_NeoPixel26.1 C10_NeoPixel27.1 C10_NeoPixel28.1 C10_NeoPixel29.1 C10_NeoPixel30.1 C10_NeoPixel31.1 C10_NeoPixel32.1 C10_NeoPixel33.1 C10_NeoPixel34.1 C10_NeoPixel35.1 C10_NeoPixel36.1 C10_NeoPixel37.1 C10_NeoPixel38.1 C10_NeoPixel39.1 C10_NeoPixel40.1 C10_NeoPixel41.1 C10_NeoPixel42.1 C10_NeoPixel43.1 C10_NeoPixel44.1 C10_NeoPixel45.1 C10_NeoPixel46.1 C10_NeoPixel47.1 C10_NeoPixel48.1 C10_NeoPixel49.1 C10_NeoPixel50.1 C10_NeoPixel51.1 C10_NeoPixel52.1 C10_NeoPixel53.1 C10_NeoPixel54.1 C10_NeoPixel55.1 C10_NeoPixel56.1 C10_NeoPixel57.1 C10_NeoPixel58.1 C10_NeoPixel59.1 C10_NeoPixel60.1 U1.6 U1.16 U1.29 U1.39 U3_NeoPixel1.3 U3_NeoPixel2.3 U3_NeoPixel3.3 U3_NeoPixel4.3 U3_NeoPixel5.3 U3_NeoPixel6.3 U3_NeoPixel7.3 U3_NeoPixel8.3 U3_NeoPixel9.3 U3_NeoPixel10.3 U3_NeoPixel11.3 U3_NeoPixel12.3 U3_NeoPixel13.3 U3_NeoPixel14.3 U3_NeoPixel15.3 U3_NeoPixel16.3 U3_NeoPixel17.3 U3_NeoPixel18.3 U3_NeoPixel19.3 U3_NeoPixel20.3 U3_NeoPixel21.3 U3_NeoPixel22.3 U3_NeoPixel23.3 U3_NeoPixel24.3 U3_NeoPixel25.3 U3_NeoPixel26.3 U3_NeoPixel27.3 U3_NeoPixel28.3 U3_NeoPixel29.3 U3_NeoPixel30.3 U3_NeoPixel31.3 U3_NeoPixel32.3 U3_NeoPixel33.3 U3_NeoPixel34.3 U3_NeoPixel35.3 U3_NeoPixel36.3 U3_NeoPixel37.3 U3_NeoPixel38.3 U3_NeoPixel39.3 U3_NeoPixel40.3 U3_NeoPixel41.3 U3_NeoPixel42.3 U3_NeoPixel43.3 U3_NeoPixel44.3 U3_NeoPixel45.3 U3_NeoPixel46.3 U3_NeoPixel47.3 U3_NeoPixel48.3 U3_NeoPixel49.3 U3_NeoPixel50.3 U3_NeoPixel51.3 U3_NeoPixel52.3 U3_NeoPixel53.3 U3_NeoPixel54.3 U3_NeoPixel55.3 U3_NeoPixel56.3 U3_NeoPixel57.3 U3_NeoPixel58.3 U3_NeoPixel59.3 U3_NeoPixel60.3 | length 13
  Top Layer w0.3: U3_NeoPixel1.3 4.079,93.279 4.565,92.793 6.553,90.805 U3_NeoPixel2.3 6.288,89.019 C10_NeoPixel2.1
pads on no net: R3.3 S1.0 S1.D S1.E S2.0 S2.3 S3.0 S3.3 U1.2 U1.5 U1.12 U1.13 U1.32 U1.35 U1.37
copper on no net: | length 5
  Top Layer w0.3: 9.014,89.001 10.465,88.163 ; 9.192,89.382 10.643,88.544 ; 9.319,89.738 10.77,88.9

## Keep-outs
Keep-Out Layer:
  the board outline again, w0.2

## Silkscreen, mask and mechanical layers (free items; w line width, h text height)
Mechanical 1:
  text "CUTOUT" at -26,24 h9
  text "CUTOUT" at -25,-32 h9
Mechanical 13:
  lines w0.2: 0,100 0,90.625 78.481,45.312 ; 78.486,-45.313 78.481,45.312 ; 86.6,50 78.481,45.312